# Altium PCB Test.PcbDoc (part 9 of 9)
Units mm, origin at the board's own origin, x right, y up, seen from the top; angles counter-clockwise.
Board outline 152.4 x 101.6 mm, 2 copper layers (Top Layer, Bottom Layer); 1 components, 0 nets, 1713 pads, 1 vias.
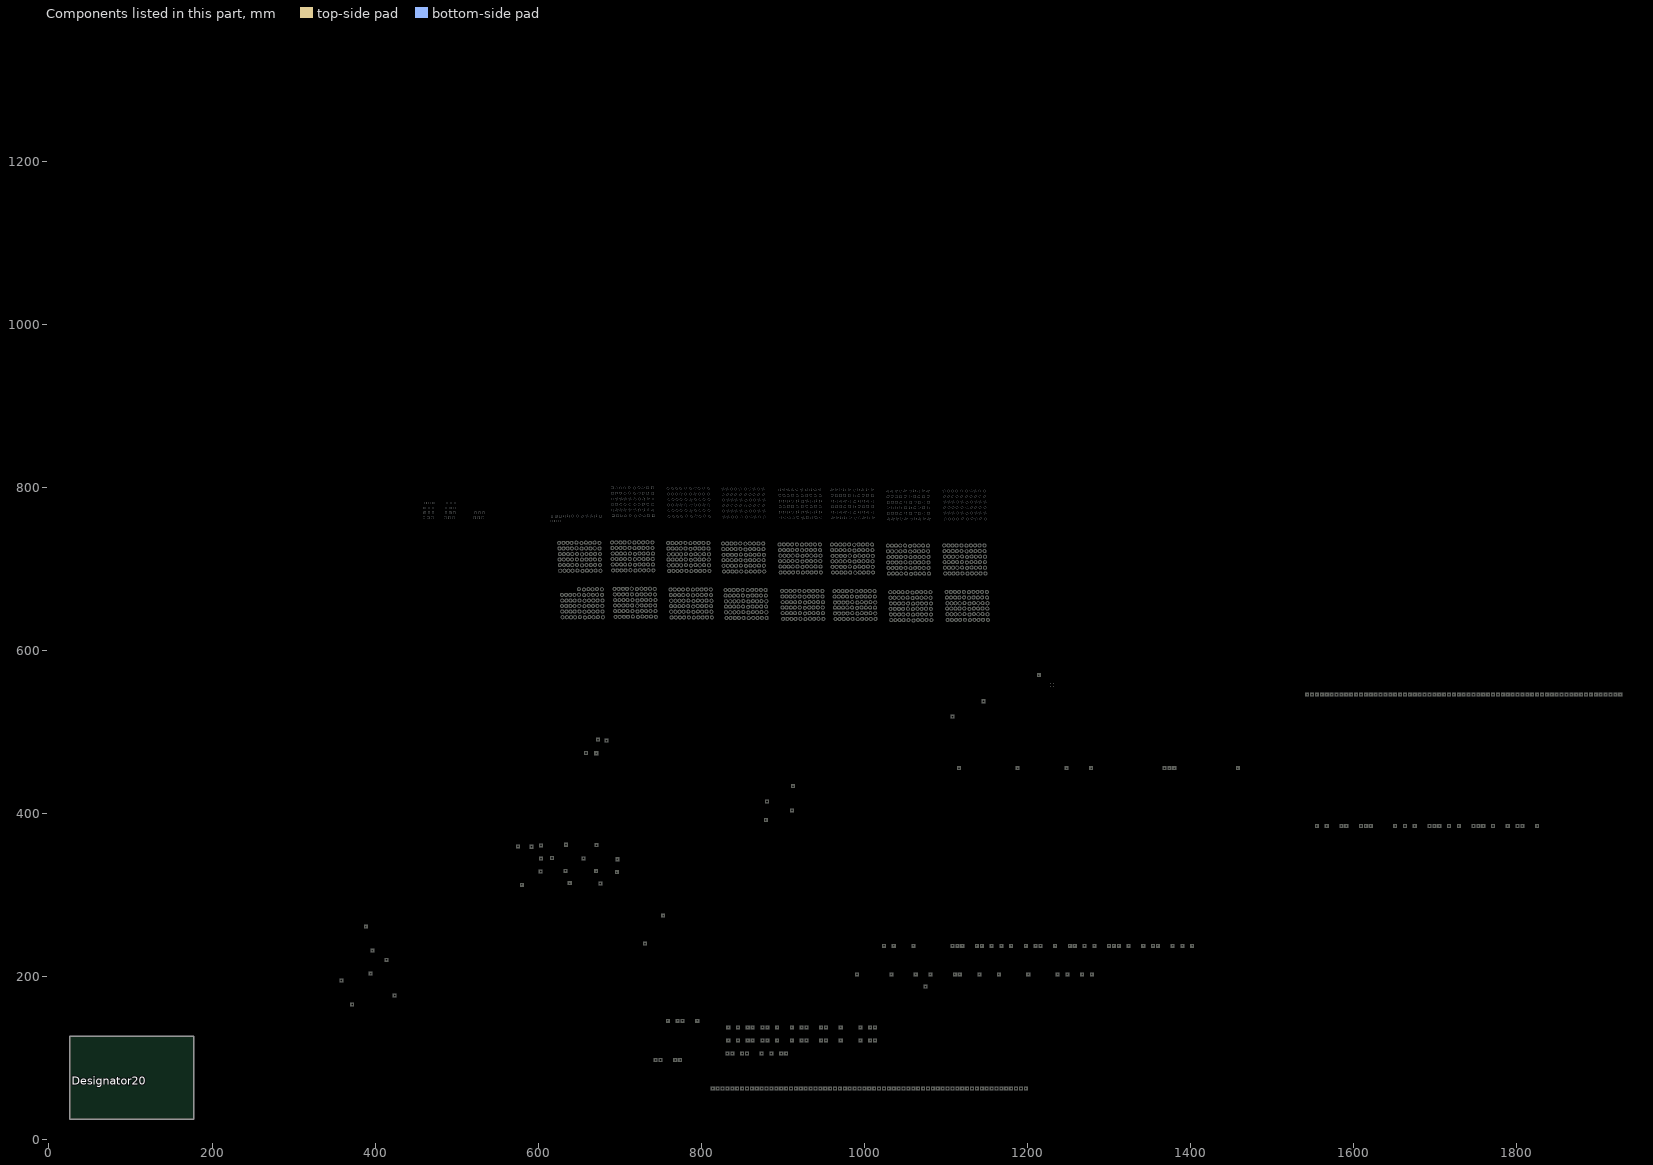
[diagram p9: the components of this part, seen from the top]

## Via types
v1: diameter 0.9, hole 0.4, Top Layer to Bottom Layer, 1 vias

## Nets (pads, with @x,y where several pads share a name; then routed paths per layer and width w, separated by ;. In a path a pad name is that pad's centre, name@x,y a point inside that pad or via, vN(x,y) a via of type N, cw(c..) or ccw(c..) an arc to the next point about the centre after c; other vN are vias at no path point) (continued)
copper on no net: (continued)
  Top Layer w0.254: 2.54,0 ccw(c0,0) 2.54,0 ; 2.54,0 ccw(c0,0) 2.54,0 ; 2.54,0 ccw(c0,0) 2.54,0 ; 135.175,110.236 ccw(c130.175,110.236) 135.175,110.236 ; 135.175,110.236 ccw(c130.175,110.236) 135.175,110.236 ; 135.175,110.236 ccw(c130.175,110.236) 135.175,110.236 ; 135.175,110.236 ccw(c130.175,110.236) 135.175,110.236 ; 135.175,110.236 ccw(c130.175,110.236) 135.175,110.236 ; 135.175,110.236 ccw(c130.175,110.236) 135.175,110.236 ; 145.763,91.821 ccw(c135.763,91.821) 145.763,91.821 ; 145.763,91.821 ccw(c135.763,91.821) 145.763,91.821 ; 108.124,90.551 ccw(c103.124,90.551) 108.124,90.551 ; 111.934,103.251 ccw(c106.934,103.251) 111.934,103.251 ; 118.11,85.852 ccw(c115.57,85.852) 118.11,85.852 ; 120.189,93.98 ccw(c115.189,93.98) 120.189,93.98 ; 120.57,111.887 ccw(c115.57,111.887) 120.57,111.887 ; 121.158,72.39 ccw(c118.618,72.39) 121.158,72.39 ; 136.779,75.819 ccw(c134.239,75.819) 136.779,75.819 ; 150.86,191.643 ccw(c149.86,191.643) 150.86,191.643 ; 151.638,76.2 ccw(c149.098,76.2) 151.638,76.2 ; 156.829,156.591 ccw(c155.829,156.591) 156.829,156.591 ; 158.861,175.133 ccw(c157.861,175.133) 158.861,175.133 ; 170.545,153.162 ccw(c169.545,153.162) 170.545,153.162 ; 171.688,186.182 ccw(c170.688,186.182) 171.688,186.182 ; 171.925,97.917 ccw(c161.925,97.917) 171.925,97.917 ; 174.101,173.101 ccw(c173.101,173.101) 174.101,173.101 ; 184.134,182.118 ccw(c183.134,182.118) 184.134,182.118 ; 184.388,144.653 ccw(c183.388,144.653) 184.388,144.653 ; 184.515,164.211 ccw(c183.515,164.211) 184.515,164.211 ; 194.548,160.655 ccw(c193.548,160.655) 194.548,160.655 ; 196.326,144.018 ccw(c195.326,144.018) 196.326,144.018 ; 197.342,175.895 ccw(c196.342,175.895) 197.342,175.895 ; 204.962,156.464 ccw(c203.962,156.464) 204.962,156.464 ; 206.867,144.145 ccw(c205.867,144.145) 206.867,144.145 ; 206.867,172.593 ccw(c205.867,172.593) 206.867,172.593 ; 933.54,203 ccw(c931,203) 933.54,203 ; 939.54,203 ccw(c937,203) 939.54,203 ; 945.54,203 ccw(c943,203) 945.54,203 ; 963.54,188 ccw(c961,188) 963.54,188 ; 969.54,188 ccw(c967,188) 969.54,188 ; 975.54,188 ccw(c973,188) 975.54,188 ; 981.54,188 ccw(c979,188) 981.54,188 ; 987.54,188 ccw(c985,188) 987.54,188 ; 993.54,188 ccw(c991,188) 993.54,188 ; 999.54,188 ccw(c997,188) 999.54,188 ; 1005.54,188 ccw(c1003,188) 1005.54,188 ; 1011.54,188 ccw(c1009,188) 1011.54,188 ; 1017.54,188 ccw(c1015,188) 1017.54,188 ; 1023.54,188 ccw(c1021,188) 1023.54,188 ; 1029.54,188 ccw(c1027,188) 1029.54,188 ; 1035.54,188 ccw(c1033,188) 1035.54,188 ; 1041.54,188 ccw(c1039,188) 1041.54,188 ; 1047.54,188 ccw(c1045,188) 1047.54,188 ; 1053.54,188 ccw(c1051,188) 1053.54,188 ; 1059.54,188 ccw(c1057,188) 1059.54,188 ; 1065.54,188 ccw(c1063,188) 1065.54,188 ; 1071.54,188 ccw(c1069,188) 1071.54,188 ; 1077.54,188 ccw(c1075,188) 1077.54,188 ; 1083.54,188 ccw(c1081,188) 1083.54,188 ; 1089.54,188 ccw(c1087,188) 1089.54,188 ; 1095.54,188 ccw(c1093,188) 1095.54,188 ; 1101.54,188 ccw(c1099,188) 1101.54,188 ; 1107.54,188 ccw(c1105,188) 1107.54,188 ; 1113.54,188 ccw(c1111,188) 1113.54,188 ; 1119.54,188 ccw(c1117,188) 1119.54,188 ; 1125.54,188 ccw(c1123,188) 1125.54,188 ; 1131.54,188 ccw(c1129,188) 1131.54,188 ; 1137.54,188 ccw(c1135,188) 1137.54,188 ; 1143.54,188 ccw(c1141,188) 1143.54,188 ; 1149.54,188 ccw(c1147,188) 1149.54,188 ; 1155.54,188 ccw(c1153,188) 1155.54,188 ; 1161.54,188 ccw(c1159,188) 1161.54,188 ; 1167.54,188 ccw(c1165,188) 1167.54,188 ; 1173.54,188 ccw(c1171,188) 1173.54,188 ; 1179.54,188 ccw(c1177,188) 1179.54,188 ; 1185.54,188 ccw(c1183,188) 1185.54,188 ; 1191.54,188 ccw(c1189,188) 1191.54,188 ; 1197.54,188 ccw(c1195,188) 1197.54,188 ; 1203.54,188 ccw(c1201,188) 1203.54,188 ; 1209.54,188 ccw(c1207,188) 1209.54,188 ; 1215.54,188 ccw(c1213,188) 1215.54,188 ; 1221.54,188 ccw(c1219,188) 1221.54,188 ; 1227.54,188 ccw(c1225,188) 1227.54,188 ; 1233.54,188 ccw(c1231,188) 1233.54,188 ; 1239.54,188 ccw(c1237,188) 1239.54,188 ; 1245.54,188 ccw(c1243,188) 1245.54,188 ; 1251.54,188 ccw(c1249,188) 1251.54,188 ; 1257.54,188 ccw(c1255,188) 1257.54,188 ; 1263.54,188 ccw(c1261,188) 1263.54,188 ; 1269.54,188 ccw(c1267,188) 1269.54,188 ; 1275.54,188 ccw(c1273,188) 1275.54,188 ; 1281.54,188 ccw(c1279,188) 1281.54,188 ; 1287.54,188 ccw(c1285,188) 1287.54,188 ; 1293.54,188 ccw(c1291,188) 1293.54,188 ; 1299.54,188 ccw(c1297,188) 1299.54,188 ; 1305.54,188 ccw(c1303,188) 1305.54,188 ; 1311.54,188 ccw(c1309,188) 1311.54,188 ; 1317.54,188 ccw(c1315,188) 1317.54,188 ; 1323.54,188 ccw(c1321,188) 1323.54,188 ; 1329.54,188 ccw(c1327,188) 1329.54,188 ; 1335.54,188 ccw(c1333,188) 1335.54,188 ; 1341.54,188 ccw(c1339,188) 1341.54,188 ; 1347.54,188 ccw(c1345,188) 1347.54,188
  Top Layer w0.3: 78.359,105.664 86.233,105.664
  Top Layer w0.8: 1122,556 ccw(c1121,556) 1122,556 ; 1122,563 ccw(c1121,563) 1122,563
  other v1: 75.692,72.644

## Silkscreen, mask and mechanical layers (free items; w line width, h text height)
Top Overlay:
  drawing of 6104 lines, arcs and shapes, not listed